# Altium PCB Nixie.PcbDoc
Units mil, origin at the board's own origin, x right, y up, seen from the top; angles counter-clockwise.
Board outline 4881.82 x 1574.73 mil, 2 copper layers (Top Layer, Bottom Layer), stack 61.855 mil thick; 103 components, 85 nets, 313 pads, 101 vias.
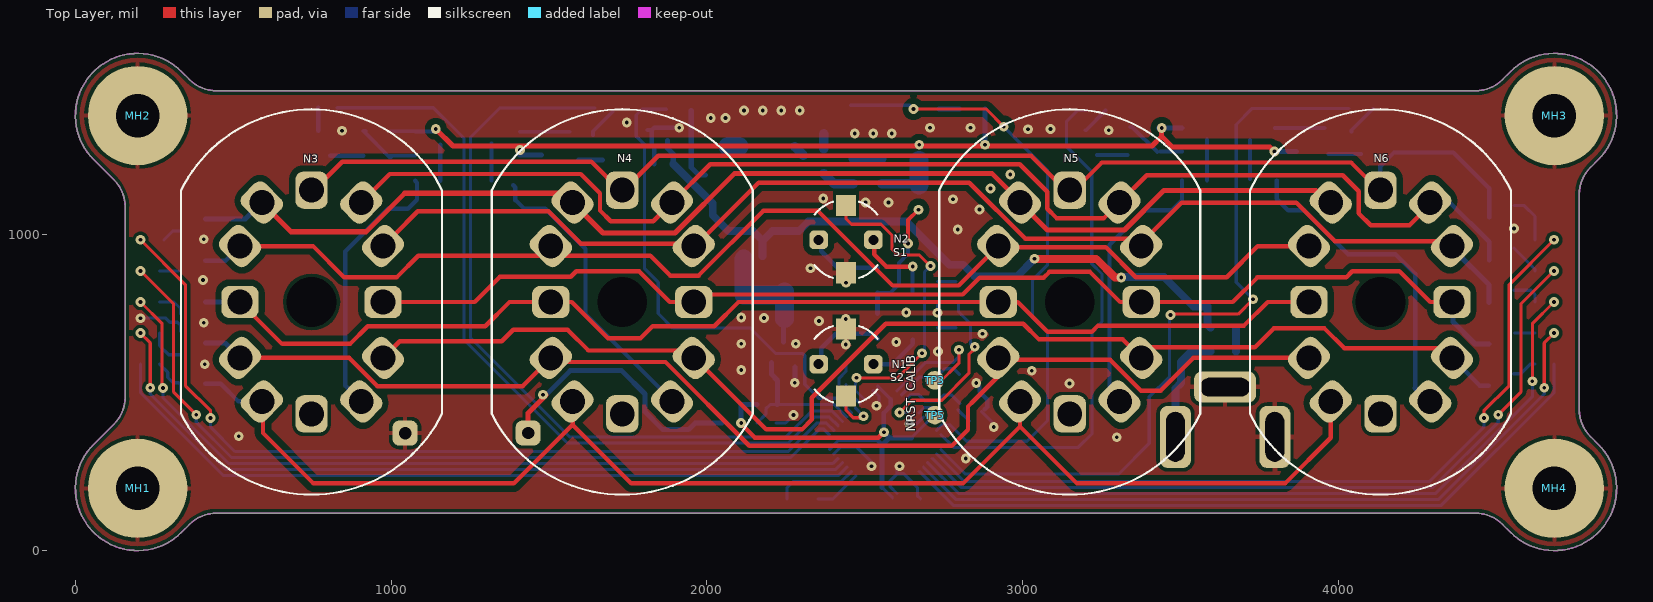
[diagram p0: Top Layer view]
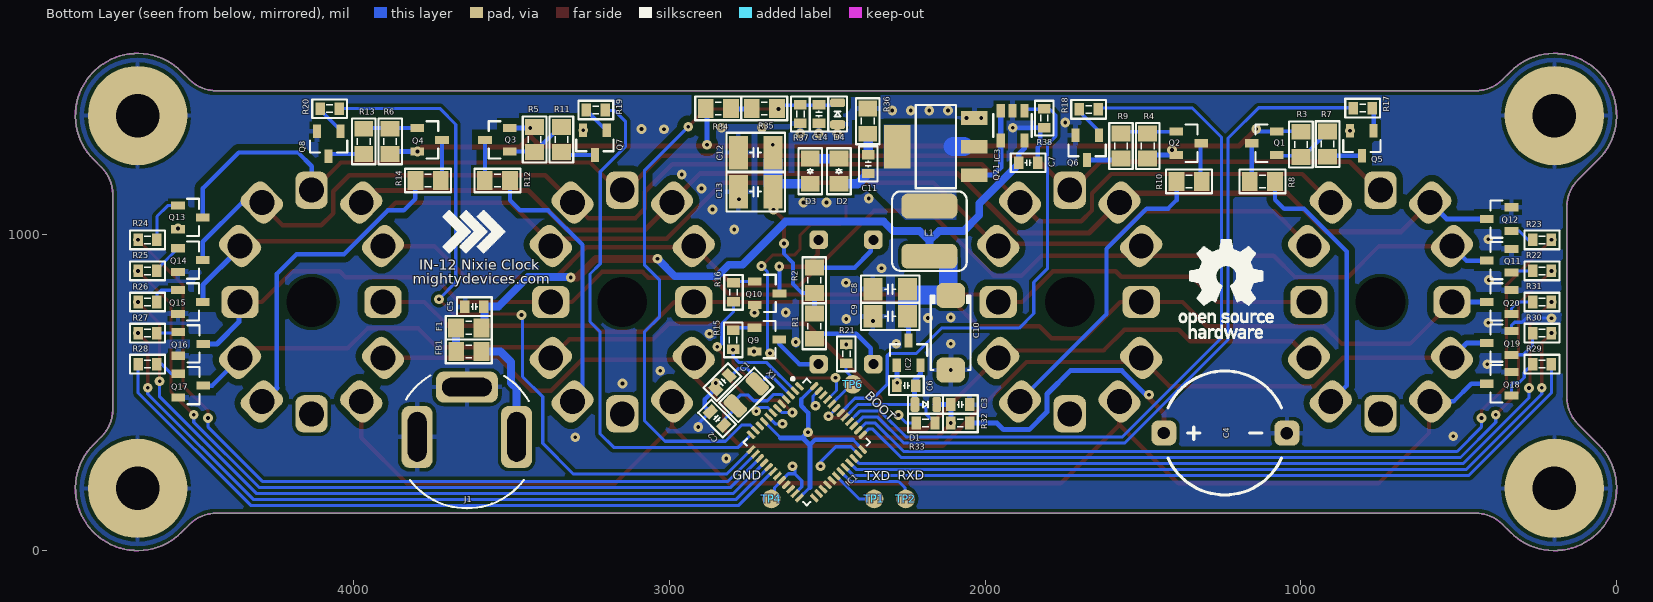
[diagram p1: Bottom Layer view, seen from below]

## Layer stack, top to bottom
Top Layer: signal copper 1.4
Dielectric: core 59.0551, FR-4, Dk 4.8
Bottom Layer: signal copper 1.4

## Board outline
57.66,336.04 122.12,400.51 ccw(c36.77,485.87) 157.48,485.87 157.48,1088.93 ccw(c36.77,1088.93) 122.12,1174.29 57.66,1238.76 cw(c196.85,1377.95) 336.04,1517.15 361.14,1492.05 ccw(c446.5,1577.4) 446.5,1456.69 4435.39,1456.69 ccw(c4435.39,1577.4) 4520.75,1492.05 4545.85,1517.15 cw(c4685.04,1377.95) 4824.23,1238.76 4799.13,1213.66 ccw(c4884.49,1128.3) 4763.78,1128.3 4763.78,446.5 ccw(c4884.49,446.5) 4799.13,361.14 4824.23,336.04 cw(c4685.04,196.85) 4545.85,57.66 4520.75,82.75 ccw(c4435.39,-2.6) 4435.39,118.11 446.5,118.11 ccw(c446.5,-2.6) 361.14,82.75 336.04,57.66 cw(c196.85,196.85)

## Design rules (kind name [scope] priority, off if disabled: settings)
Clearance Clearance_HV [InNetClass('HV') AND (NOT InNet('GND')) vs InPoly] p1: gap=20
Clearance Clearance_BATT [InComponent('BAT') vs InPoly AND NOT (OnLayer('Keep-Out Layer'))] p2: gap=20
Clearance Clearance_Poly [InPoly] p3: gap=11
Clearance Clearance_Fanout [IsPad AND InComponentClass('ICs') vs IsTrack] p4: gap=8
Clearance Clearance_IC [InComponentClass('ICs') vs InComponentClass('ICs')] p5: gap=7
Clearance [All] p6: gap=9
ComponentClearance [All] p1: gap=5 collisioncheckmode=3 verticalgap=0 showdistances=FALSE
HoleSize [All] p1: absolutevalues=TRUE maxlimit=196.85 minlimit=11.81 maxpercent=80.000 minpercent=20.000
MinimumSolderMaskSliver [All] p1: minsoldermaskwidth=1
PolygonConnect PolygonConnect_VSW [InNet('VSW');] p1: connectstyle=Direct reliefconductorwidth=10 reliefentries=4 polygonreliefangle="90 Angle"
PolygonConnect PolygonConnect_IC [InComponentClass('ICs') AND NOT HasFootprint('SOP8')] p2: connectstyle=Relief reliefconductorwidth=10 reliefentries=4 polygonreliefangle="90 Angle"
PolygonConnect PolygonConnect_VIA [IsVia] p3: connectstyle=Direct reliefconductorwidth=10 reliefentries=4 polygonreliefangle="90 Angle"
PolygonConnect [All] p4: connectstyle=Relief reliefconductorwidth=15 reliefentries=4 polygonreliefangle="90 Angle"
RoutingVias [All] p1: holewidth=11.81 width=11.81 viastyle="Through Hole" minholewidth=11.81 minwidth=11.81 maxholewidth=39.37 maxwidth=39.37
SilkToSilkClearance [All] p1: silktosilkclearance=2
SilkscreenOverComponentPads [(InComponent(Comment Like 'N?'))] p1: minsilkscreentomaskgap=1
SolderMaskExpansion SolderMaskExpansion_VIA [IsVia] p1: expansion=-196.85
SolderMaskExpansion [All] p2: expansion=4
Width [All] p1: maxlimit=100 minlimit=9 preferedwidth=10
23 further rules are at their usual default settings.

## Classes and differential pairs
net class HV: 130V FB GND KHV0 KHV1 KHV2 KHV3 KHV4 KHV5 KHV6 KHV7 KHV8 KHV9 NetC11_1 NetD2_2 NetN1_1 NetN1_2 NetN2_1 NetN2_2 NetN3_1 NetN4_1 NetN5_1 NetN6_1 NetQ1_1 NetQ1_3 NetQ2_1 NetQ2_3 NetQ3_1 NetQ3_3 NetQ4_1 NetQ4_3 NetQ5_3 NetQ6_3 NetQ7_3 NetQ8_3 NetR34_1 VSW
component class ICs: IC1

## Components (designator, comment, footprint, x,y, rotation, side; value= is the part's Value field where it differs from the comment)
C1 "15p" 0603_C 2832.55,533.46 r135 bottom
C2 "15p" 0603_C 2849.28,418.31 r225 bottom
C3 "100n" 0603_C 2078.72,462.6 r0 bottom
C4 "0F33/5V5" CPOL_10x6.5 1339.57,372.05 r180 bottom
C5 "1u" 0603_C 3618.11,772.64 r180 bottom
C6 "1u" 0603_C 2249.59,522.64 r180 bottom
C7 "100n" 0603_C 1864.17,1228.35 r0 bottom
C8 "10u" 1206_C 2300.77,827.76 r180 bottom
C9 "10u" 1206_C 2300.77,742.13 r180 bottom
C10 "100u/16V" TAJ_C 2109.25,808.07 r180 bottom
C11 "1n" 0603_C 2370.51,1224.41 r270 bottom
C12 "100n/200V" 1210_C 2726.95,1260.83 r180 bottom
C13 "100n/200V" 1210_C 2726.95,1136.81 r180 bottom
C14 "1n" 0603_C 2526.57,1382.87 r90 bottom
D1 "MCL103A" MICROMELF 2153.54,462.6 r0 bottom
D2 "1N4148" 0805_DSEMI 2463.58,1201.77 r90 bottom
D3 "1N4148" 0805_DSEMI 2554.13,1201.77 r270 bottom
D4 "3V1" MICROMELF 2467.52,1418.31 r270 bottom
F1 "500mA" 0805_PF 3635.98,705.71 r180 bottom
FB1 "100R@100MHz" 0805_FB 3635.83,630.91 r0 bottom
IC1 "STM32L152C8U6" QFN48 2564.96,343.5 r225 bottom
IC2 "MCP1703-3V3" SOT23-3L 2242.7,625.98 r90 bottom
IC3 "IRS44273" SOT23-5AN 1913.39,1346.46 r270 bottom
J1 "FC681445" FC681445_TH 3641.73,360.24 r0 bottom
L1 "4u7/3A" DLG-0504 2176.84,1011.81 r0 bottom
MH1 "Mouting Hole" MH_M3 196.85,196.85 r0 top
MH2 "Mouting Hole" MH_M3 196.85,1377.95 r0 top
MH3 "Mouting Hole" MH_M3 4685.04,1377.95 r0 top locked
MH4 "Mouting Hole" MH_M3 4685.04,196.85 r0 top locked
N1 "INS-1" INS-1 2440.94,590.55 r270 top locked
N2 "INS-1" INS-1 2440.94,984.25 r270 top locked
N3 "INA-12A" IN-12 748.03,787.4 r180 top locked
N4 "INA-12A" IN-12 1732.28,787.4 r180 top locked
N5 "INA-12A" IN-12 3149.61,787.4 r180 top locked
N6 "INA-12A" IN-12 4133.86,787.4 r180 top locked
Q1 "KST92" SOT23-3L 1116.14,1290.35 r0 bottom
Q2 "KST92" SOT23-3L 1355.32,1290.35 r180 bottom
Q3 "KST92" SOT23-3L 3545.11,1301.18 r0 bottom
Q4 "KST92" SOT23-3L 3759.84,1301.18 r180 bottom
Q5 "BF820" SOT23-3L 807.09,1290.35 r270 bottom
Q6 "BF820" SOT23-3L 1677.17,1276.57 r270 bottom
Q7 "BF820" SOT23-3L 3236.22,1292.32 r270 bottom
Q8 "BF820" SOT23-3L 4079.72,1288.39 r270 bottom
Q9 "BF820" SOT23-3L 2691.65,668.31 r180 bottom
Q10 "BF820" SOT23-3L 2690.94,814.96 r180 bottom
Q11 "BF820" SOT23-3L 372.05,918.31 r0 bottom
Q12 "BF820" SOT23-3L 372.05,1050.2 r0 bottom
Q13 "BF820" SOT23-3L 4517.72,1055.12 r180 bottom
Q14 "BF820" SOT23-3L 4517.72,920.27 r180 bottom
Q15 "BF820" SOT23-3L 4517.72,787.4 r180 bottom
Q16 "BF820" SOT23-3L 4516.73,654.53 r180 bottom
Q17 "BF820" SOT23-3L 4516.73,522.64 r180 bottom
Q18 "BF820" SOT23-3L 372.05,528.54 r0 bottom
Q19 "BF820" SOT23-3L 372.05,657.48 r0 bottom
Q20 "BF820" SOT23-3L 372.05,787.4 r0 bottom
Q21 "IRFL4315" SOT-223_Connected 2156.5,1279.53 r90 bottom
R1 "1M" 0805_R 2541.34,710.63 r90 bottom
R2 "1M" 0805_R 2541.34,856.3 r270 bottom
R3 "1M" 0805_R 1000,1286.42 r270 bottom
R4 "1M" 0805_R 1485.24,1281.5 r90 bottom
R5 "1M" 0805_R 3427.17,1302.17 r270 bottom
R6 "1M" 0805_R 3884.84,1296.26 r90 bottom
R7 "1M" 0805_R 915.35,1287.4 r270 bottom
R8 "0" 0805_R 1122.05,1169.29 r0 bottom
R9 "1M" 0805_R 1569.88,1281.5 r270 bottom
R10 "0" 0805_R 1354.33,1169.29 r180 bottom
R11 "1M" 0805_R 3342.52,1302.17 r270 bottom
R12 "0" 0805_R 3545.28,1172.24 r0 bottom
R13 "1M" 0805_R 3968.5,1296.26 r270 bottom
R14 "0" 0805_R 3764.76,1172.24 r180 bottom
R15 "33k" 0603_R 2798.23,667.32 r270 bottom
R16 "33k" 0603_R 2797.24,817.91 r270 bottom
R17 "33k" 0603_R 804.13,1401.57 r0 bottom
R18 "33k" 0603_R 1672.24,1397.64 r180 bottom
R19 "33k" 0603_R 3233.27,1395.67 r180 bottom
R20 "33k" 0603_R 4076.77,1399.61 r180 bottom
R21 "33k" 0603_R 2439.94,623.03 r90 bottom
R22 "33k" 0603_R 236.22,885.83 r180 bottom
R23 "33k" 0603_R 236.22,984.25 r180 bottom
R24 "33k" 0603_R 4653.54,984.25 r0 bottom
R25 "33k" 0603_R 4653.54,885.83 r0 bottom
R26 "33k" 0603_R 4653.54,787.4 r0 bottom
R27 "33k" 0603_R 4653.54,688.98 r0 bottom
R28 "33k" 0603_R 4653.54,590.55 r0 bottom
R29 "33k" 0603_R 236.22,590.55 r180 bottom
R30 "33k" 0603_R 236.22,688.98 r180 bottom
R31 "33k" 0603_R 236.22,787.4 r180 bottom
R32 "330" 0603_R 2078.72,404.15 r180 bottom
R33 "10k" 0603_R 2188.98,404.15 r180 bottom
R34 "470k" 0805_R 2845.47,1400.59 r0 bottom
R35 "470k" 0805_R 2699.8,1400.68 r0 bottom
R36 "330" 0805_R 2372.05,1360.24 r270 bottom
R37 "10k" 0603_R 2585.63,1382.87 r270 bottom
R38 "33k" 0603_R 1812.99,1370.08 r270 bottom
S1 "SW-PB" DTSM32N 2440.94,986.22 r270 top
S2 "SW-PB" DTSM32N 2440.94,595.47 r90 top
TP1 "Test Point" TP_1_5 2351.95,163.39 r180 bottom
TP2 "Test Point" TP_1_5 2251.95,163.39 r180 bottom
TP3 "Test Point" TP_1_5 2722.44,539.37 r0 top
TP4 "Test Point" TP_1_5 2677.31,163.39 r180 bottom
TP5 "Test Point" TP_1_5 2722.44,429.13 r0 top
TP6 "Test Point" TP_1_5 2419.12,526.57 r180 bottom
X1 "32k" CFPX–217 2756.76,493.11 r135 bottom

## Footprints (in the part's own frame and the unit in brackets; to place one, negate y for a bottom-side part, rotate by r counter-clockwise, add the part's x,y. Pads: shape width x height; smd on the part's side, far side on the other; paste and mask are expansions set on the pad)
0603_C [mil]
  rect 30x40 smd: 1(-30,0) 2(30,0)
  silkscreen extent -55,-30 55,30, body extent -32,-17 32,17, height 26
0603_R [mil]
  rect 30x40 smd: 1(-30,0) 2(30,0)
  silkscreen extent -55,-30 55,30, body extent -32,-17 32,17, height 26
0805_DSEMI [mil]
  rect 50x60 smd: 1(-40,0) 2(40,0)
  silkscreen extent -73,-37 73,37, body extent -41,-28 41,28, height 11
0805_FB [mil]
  rect 50x60 smd: 1(-40,0) 2(40,0)
  silkscreen extent -73,-37 73,37, body extent -42,-28 42,28, height 36
0805_PF [mil]
  rect 50x60 smd: 1(-40,0) 2(40,0)
  silkscreen extent -73,-37 73,37, body extent -42,-28 42,28, height 36
0805_R [mil]
  rect 50x60 smd: 1(-40,0) 2(40,0)
  silkscreen extent -73,-37 73,37, body extent -42,-28 42,28, height 36
1206_C [mil]
  rect 60x70 smd: 1(-55,0) 2(55,0)
  silkscreen extent -93,-43 93,43, body extent -62,-32 62,32, height 42
1210_C [mil]
  rect 60x106.3 smd: 1(-55,0) 2(55,0)
  silkscreen extent -93,-63 93,63, body extent -74,-51 74,51, height 42
CFPX–217 [mm]
  rrect50% 1.1x1.9 smd: 1(-1.25,0) 2(1.25,0)
  silkscreen extent -2,-1.1 2,1.1, body extent -1.6,-0.75 1.6,0.75, height 0.9
CPOL_10x6.5 [mm]
  rrect50% 2x2 hole 1: 1(-2.4,0.01) 2(7.5,0)
  silkscreen extent -2.07,-4.97 7.07,5, body extent -2.4,-4.98 7.56,5, height 6.6
DLG-0504 [mm]
  rrect50% 4.5x2 smd: 1(0,2.02) 2(0,-2.02)
  silkscreen extent -3,-3.2 3,3.2, body extent -2.48,-2.49 2.5,2.5, height 3.5
DTSM32N [mm]
  rect 1.7x1.6 smd: 1(-2.7,0) 2(2.7,0)
  body extent -3,-1 3,1, height 5
FC681445_TH [mm]
  rrect50% 2.5x5 hole 1.5 slot 4 at 90 deg: 1(-4,0) 3(4,0)
  rrect50% 5x2.5 hole 1.5 slot 4 at 0 deg: 2(0,-4)
  silkscreen extent -4.97,-4.93 4.9,5.75
IN-12 [mm]
  rrect50% 0x0 hole 4 unplated: 0(0,0)
  rrect50% 2.6x3 hole 2 rot 45: 1(-4,8) 2(-5.75,4.5) 7(4,-8) 8(5.75,-4.5)
  rrect50% 3x2.6 hole 2: 3(-5.75,0) 9(5.75,0)
  rrect50% 2.6x3 hole 2 rot 135: 4(-5.75,-4.5) 5(-4,-8) 10(5.75,4.5) 11(4,8)
  rrect50% 2.6x3 hole 2: 6(0,-9) 12(0,9)
  silkscreen extent -10.5,-15.5 10.5,15.5
INS-1 [mm]
  rrect50% 1.5x1.5 hole 0.8: 1(0,-2.2) 2(0,2.2)
  silkscreen extent -3.07,-2.54 3.07,2.54
MH_M3 [mm]
  round 8 hole 3.5: 1(0,0)
MICROMELF [mm]
  rrect50% 0.7x1.2 smd: 1(1.75,0) 2(0,0)
  silkscreen extent -0.5,-0.75 2.3,0.75, body extent 0,-0.6 1.8,0.6, height 1.3
QFN48 [mm]
  rrect50% 0.8x0.3 smd: 1(-3.6,2.75) 2(-3.6,2.25) 3(-3.6,1.75) 4(-3.6,1.25) 5(-3.6,0.75) 6(-3.6,0.25) 7(-3.6,-0.25) 8(-3.6,-0.75) 9(-3.6,-1.25) 10(-3.6,-1.75) 11(-3.6,-2.25) 12(-3.6,-2.75) 25(3.6,-2.75) 26(3.6,-2.25) 27(3.6,-1.75) 28(3.6,-1.25) 29(3.6,-0.75) 30(3.6,-0.25) 31(3.6,0.25) 32(3.6,0.75) 33(3.6,1.25) 34(3.6,1.75) 35(3.6,2.25) 36(3.6,2.75)
  rrect50% 0.3x0.8 smd: 13(-2.75,-3.6) 14(-2.25,-3.6) 15(-1.75,-3.6) 16(-1.25,-3.6) 17(-0.75,-3.6) 18(-0.25,-3.6) 19(0.25,-3.6) 20(0.75,-3.6) 21(1.25,-3.6) 22(1.75,-3.6) 23(2.25,-3.6) 24(2.75,-3.6) 37(2.75,3.6) 38(2.25,3.6) 39(1.75,3.6) 40(1.25,3.6) 41(0.75,3.6) 42(0.25,3.6) 43(-0.25,3.6) 44(-0.75,3.6) 45(-1.25,3.6) 46(-1.75,3.6) 47(-2.25,3.6) 48(-2.75,3.6)
  silkscreen extent -4.5,-3.6 3.6,3.6, body extent -3.6,-3.6 3.6,3.6, height 0.8
SOT23-3L [mm] "SOT23, 3-Leads, Body 2.9x1.3mm, Pitch 0.95mm, Lead Span 2.5mm, IPC High Density"
  rect 1.1x0.65 smd: 1(-1,0.95) 2(-1,-0.95) 3(1,0)
  silkscreen extent -0.25,-1.5 0.7,1.5, body extent -1.3,-1.5 1.3,1.5, height 1.1
SOT23-5AN [mm] "SOT23, 5-Leads, Body 2.9x1.6mm, Pitch 0.95mm, Lead Span 2.8mm, IPC Medium Density"
  rect 1.1x0.65 smd: 1(-1.2,0.95) 2(-1.2,0) 3(-1.2,-0.95) 4(1.2,-0.95) 5(1.2,0.95)
  silkscreen extent -0.9,-1.55 0.9,1.55, body extent -1.5,-1.5 1.5,1.5, height 1.1
SOT-223_Connected [mm] "SOT-223/SC-73; 4 Leads; Body 6.7 x 7.3 mm, inc. leads (LxW max)"
  rect 1.1x2.15 smd: 1(-2.3,-3.1) 2(0,-3.1) 3(2.3,-3.1)
  rect 3.5x2.15 smd: 2(0,3.1)
  silkscreen extent -3.35,-1.63 3.35,1.63, body extent -3.25,-3.7 3.25,2.95, height 2
TAJ_C [mm]
  rrect50% 2.3x2 smd: 1(0,0) 2(0,-6)
  silkscreen extent -1.6,-6 1.6,0, body extent -1.5,-6.1 1.5,0.05, height 2.61
TP_1_5 [mm]
  round 1.5 smd: 1(0,0)

## Part data
C1 C2 C3 C5 C6 C7 C8 C9 C11 C12 C13 C14: library part "Capacitor (Non Polar)", "Capacitor"
C4 C10: library part "Capacitor (Electrolytic)", "Capacitor"
D1: library part "Diode Schottky", "Silicon Diode"
D2 D3: library part Diode, "Silicon Diode"
D4: library part "Diode Zener", "Silicon Zener Diode"
F1: library part Fuse, "Polymer Fuse"
FB1: library part "Ferrite Bead", "Ferrite Bead"
IC1: library part STM32L152C6U6, "Cortex-M3 MCU"
IC2: library part MCP1703, "250 mA, 16V, Low Quiescent Current LDO Regulator"
IC3: "Single Low-Side Driver IC"
J1: "DC Connector"
L1: library part INDUCTOR, "Inductor"
N1 N2: "Neon Bulb"
N3 N4 N5 N6: library part IN-12A, "Nixie Tube"
Q5 Q6 Q7 Q8 Q9 Q10 Q11 Q12 Q13 Q14 Q15 Q16 Q17 Q18 Q19 Q20: "NPN high-voltage transistor"
Q21: "HEXFET Power MOSFET"
R1 R2 R3 R4 R5 R6 R7 R8 R9 R10 R11 R12 R13 R14 R15 R16 R17 R18 R19 R20 R21 R22 R23 R24 R25 R26 R27 R28 R29 R30 R31 R32 R33 R34 R35 R36 R37 R38: library part Resistor, "Resistor"
S1 S2: "Switch"
X1: library part Crystal, "Crystal Resonator"

## Via types
v1: diameter 30.81, hole 11.81, Top Layer to Bottom Layer, 66 vias
v2: diameter 31, hole 11.81, Top Layer to Bottom Layer, 35 vias

## Nets (pads, with @x,y where several pads share a name; then routed paths per layer and width w, separated by ;. In a path a pad name is that pad's centre, name@x,y a point inside that pad or via, vN(x,y) a via of type N, cw(c..) or ccw(c..) an arc to the next point about the centre after c; other vN are vias at no path point)
3V0: C3.2 D1.2 IC1.9 IC1.24 IC1.36 IC1.48 R32.1 | length 1327.2
  Top Layer w14: v2@2108.72,401.12 2152.56,357.28 2543.31,357.28 v2(2561.02,375)
  Bottom Layer w10: IC1.36 2420.04,351.7 ; IC1.48 2582.6,478.97 ; 2555.69,199.66 IC1.24 ; 2648.34,357.28 IC1.9
  Bottom Layer w14: 2420.04,351.7 2538.23,351.7 2555.69,334.24 ; v2(2561.02,375) 2561.02,436.9 2582.6,458.48 2582.6,478.97
  Bottom Layer w16: v2(2108.72,404.15) C3.2 D1.2 D1.2@2158.94,462.6 ; 2555.69,199.66 2555.69,334.24 2578.74,357.28 ; v2(2561.02,375) 2578.74,357.28 ; 2648.34,357.28 2578.74,357.28
3V3: C6.2 D1.1 IC1.41 IC2.2 R33.2 | length 476.8
  Bottom Layer w10: R33.2 2187.01,432.18 2187.01,448.82 2200.79,462.6 D1.1 2404.11,462.6 IC1.41
  Bottom Layer w16: IC2.2@2204.72,595.47 2204.72,558.14 2223.94,538.93 2223.94,464.09 D1.1
12V: C5.2 C7.2 C8.2 C9.2 C10.1 F1.2 IC2.3 IC3.5 L1.1 | length 2598.7
  Top Layer w25: v1(3038.37,924.21) 3233.27,924.21 3292.72,864.76 v2(3312.58,864.76)
  Bottom Layer w16: IC3.5 1875.98,1273.62 1893.7,1255.91 C7.2@1893.7,1224.41 ; IC2.3@2242.7,660.43 C9.2@2242.7,731.18
  Bottom Layer w25: C7.2@1893.7,1224.41 2018.7,1099.41 2018.7,1062.01 2068.9,1011.81 2146,1011.81 2176.84,980.97 ; L1.1 2176.84,980.97 ; v1(3038.37,924.21) 2983.25,869.09 2848.43,869.09 2812.01,905.51 2768.7,905.51 2632.43,1041.78 2321.31,1041.78 2291.34,1011.81 2207.68,1011.81 2176.84,980.97 ; v2@3312.58,866.14 3448.73,866.14 3542.23,772.64 3586.61,772.64 3586.61,715.08 F1.2
  Bottom Layer w60: L1.1@2117.13,923.23 2117.13,809.06 C8.2@2245.08,809.06 ; C9.2@2245.77,734.25 C8.2@2245.77,819.88
130V: C12.2 C13.2 D3.2 Q1.2 Q2.2 Q3.2 Q4.2 R1.2 R2.2 R3.1 R4.1 R5.1 R6.1 R34.2 | length 3783.7
  Top Layer w12: v2(2637.38,972.44) 2637.38,1046.83 v2(2670.28,1079.72)
  Top Layer w16: v1(1141.73,1335.63) 1195.79,1281.57 3410.36,1281.57 ; 3410.43,1281.5 3440.94,1312.01 ; v2(3440.94,1338.58) 3440.94,1312.01 ; v2@3797.24,1264.76 3783.46,1278.54 3474.41,1278.54 3440.94,1312.01
  Bottom Layer w12: R3.1@998.03,1328.39 Q1.2@1071.22,1328.39 ; Q1.2 v1@1133.86,1327.76 ; R2.2 2581.06,816.3 2608.84,844.08 2608.84,911.42 2637.38,939.96 v2(2637.38,972.44) v2@2638.7,973.75
  Bottom Layer w16: Q2.2@1406.5,1252.95 R4.1@1475.75,1252.95 ; R1.2 R2.2 ; R34.2@2880.55,1398.62 2880.55,1285.08 v2(2880.91,1285.43) ; R5.1@3431.46,1338.58 Q3.2 ; Q4.2@3807.09,1264.76 R6.1@3868.46,1264.76
  Bottom Layer w30: D3.2 C13.2@2666.34,1161.77
  Bottom Layer w60: C13.2@2671.95,1157.48 C12.2@2671.95,1235.51
  other v1: 1408.46,1268.7 2673.23,1285.08
  other v2: 3798.23,1263.78
A1: IC1.39 R17.2 | length 2445.7
  Bottom Layer w10: R17.2@829.21,1402.56 1133.86,1402.56 1222.93,1313.48 1231.3,1305.12 1231.3,667.03 1557.18,341.15 1557.31,341.02 2258.63,341.02 2340.46,422.84 2388.19,422.84 IC1.39
A2: IC1.40 R18.2 | length 2424.2
  Bottom Layer w10: R18.2@1646.18,1401.57 1343.5,1401.57 1251.97,1310.04 1251.97,673.23 1565.18,360.02 2250.76,360.02 2332.59,441.84 2397.03,441.84 IC1.40
A3: IC1.12 R19.2 | length 1640.4
  Bottom Layer w10: IC1.12 2782.13,326.77 3177.14,326.77 3220.06,369.69 3220.06,693.5 3251.97,725.41 3251.97,875.98 3219.49,908.46 3219.49,1199.8 3139.76,1279.53 3139.76,1360.24 3173.23,1393.7 R19.2@3203.27,1393.7
A4: IC1.13 R20.2 | length 2397.7
  Top Layer w10: v2@3468.5,749.02 3683.07,749.02 v1(3730.31,796.26)
  Bottom Layer w10: IC1.13 2819.45,242.13 3304.13,242.13 3401.57,339.57 3401.57,487.2 3465.55,551.18 v2@3465.55,743.11 ; v1(3730.31,796.26) 3677.17,849.41 3677.17,1349.82 3727.94,1400.59 R20.2@4034.45,1400.59
  other v2: 3468.5,746.06
BOOT0: IC1.44 R21.1 TP6.1 | length 149.1
  Bottom Layer w10: TP6.1 2419.12,545.65 2440.93,567.46 R21.1@2440.93,586.14 ; TP6.1@2440.78,526.57 2440.78,509.44 IC1.44
DOWN: IC1.45 S1.1 | length 1007.2
  Top Layer w10: S1.1 2440.94,1050.77 2458.25,1033.46 2551.76,1033.46 2586.61,998.61 2586.61,954.31 2604.9,936.02 2673.8,936.02 v2(2708.25,901.57) ; v2@2471.05,546.26 2602.94,546.26 v2(2681.68,625)
  Bottom Layer w10: v2@2471.05,546.26 2471.05,507.02 IC1.45 ; v2(2681.68,625) 2689.55,632.87 2689.55,882.87 v2(2708.25,901.57)
  other v2: 2474,547.24
FB: C14.2 D4.2 IC1.11 R35.1 R37.1 | length 1932.5
  Top Layer w10: v2(2654.88,1398.71) 2884.75,1398.71 v2(2940.95,1342.52)
  Bottom Layer w10: D4.2@2454.72,1410.43 R35.1@2643.16,1410.43 ; IC1.11 2744.37,397.64 2771.64,397.64 2822.82,346.46 3014.35,346.46 3079.31,411.42 3079.31,693.32 3031.5,741.14 3031.5,856.3 3078.74,903.54 3078.74,1204.73 v2(2940.95,1342.52) v2@2940.45,1343.01
GND: C1.1 C2.1 C3.1 C4.2 C5.1 C6.1 C7.1 C8.1 C9.1 C10.2 C12.1 C13.1 C14.1 D4.1 IC1.8 IC1.20 IC1.23 IC1.35 IC1.47 IC2.1 IC3.2 J1.2 J1.3 MH1.1 MH2.1 MH3.1 MH4.1 Q5.2 Q6.2 Q7.2 Q8.2 Q9.2 Q10.2 Q11.2 Q12.2 Q13.2 Q14.2 Q15.2 Q16.2 Q17.2 Q18.2 Q19.2 Q20.2 Q21.3 R21.2 R33.1 R36.1 R37.2 R38.2 S1.2 S2.2 TP4.1 | length 1163.5
  Bottom Layer w10: v1(206.22,736.22) 286.06,736.22 299.08,723.2 323.13,723.2 332.68,713.66 Q19.2 ; R33.1 2249.62,404.15 v1(2274.61,429.13) ; IC1.35 2424.92,328.74 2474,328.74 2522.91,279.83 v1@2522.91,266.73 ; IC1.47 2545.85,487.89 2545.85,466.77 v2(2537.74,458.66) ; IC1.23 2581.28,201.91 2581.28,221.46 2602.94,243.11 ; v1(2610.24,266.73) 2602.94,259.43 2602.94,243.11 ; v2(2642.31,401.57) 2643.29,400.59 2663.8,400.59 IC1.8 ; TP4.1 2666.9,173.79 2666.9,199.8 IC1.20 2623.6,243.11 2602.94,243.11 ; v1@2730.31,753.53 Q10.2 ; C2.1 2908.59,401.43 v1(2908.59,391.73)
  Bottom Layer w14: R38.2@1812.99,1332.2 R38.2@1825.79,1332.2 ; C7.1@1834.17,1223.43 C7.1 1834.17,1278.11 1825.79,1286.49 R38.2@1825.79,1332.2 ; v1(1912.4,1339.57) 1833.15,1339.57 R38.2@1825.79,1332.2 ; C1.1@2863.73,520.13 2863.73,503.39 2887.8,479.33 2887.8,454.72 C2.1@2880.47,447.39
  Bottom Layer w16: C6.1@2279.53,532.01 IC2.1@2279.53,581.69
  other v1: 2521.82,266.73 2819.88,291.34 3298.31,359.25 517.72,362.2 3149.2,529.53 2853.71,530.51 2279.02,531.5 3029.53,569.88 2109.25,571.85 409.45,590.55 2732.27,630.91 2439.94,653.03 2109.25,655.02 2281.5,655.02 2600.38,660.43 2873.03,686.59 406.79,721.46 2355.77,727.36 2439.94,733.27 2181.1,736.86 2109.25,738.19 2730.89,752.95 2631.89,753.94 2440.78,848.43 404.27,857.11 2328.74,894.66 406.79,986.22 2795.28,1016.73 4557.1,1020.25 2864.17,1080.71 2502.95,1102.36 2575.79,1102.36 2779.88,1113.19 2369.09,1115.16 2898.62,1146.65 2961.61,1190.94 2468.5,1320.87 2527.07,1320.87 2585.63,1320.87 844.49,1329.72 3273.62,1331.69 3017.72,1334.65 3088.58,1335.63 2706.69,1339.57 2835.63,1339.57 1746.06,1356.3 2012.8,1370.08 2059.06,1370.08 2118.11,1393.7 2176.84,1393.7 2235.56,1393.7 2294.29,1393.7
K0: IC1.18 R28.2 | length 2294.3
  Bottom Layer w10: IC1.18@2672.56,250.67 2780.2,143.03 4327.09,143.03 4683.54,499.49 R28.2
K1: IC1.32 R29.2 | length 2447.9
  Bottom Layer w10: R29.2 206.22,499.49 467.73,237.98 2289.94,237.98 2290,238.03 2417.73,238.03 IC1.32
K2: IC1.33 R30.2 | length 2506.3
  Top Layer w10: v2(206.22,688.98) 237.2,657.99 v2(237.2,515.75)
  Bottom Layer w10: v2(237.2,515.75) 237.2,496.06 476.29,256.98 2282.07,256.98 2282.13,257.03 2408.89,257.03 IC1.33
K3: IC1.34 R31.2 | length 2559.9
  Top Layer w10: v1(206.22,787.4) 274.61,719.02 v1@274.61,517.72
  Bottom Layer w10: v1(277.56,514.76) 277.56,484.25 485.83,275.98 2274.2,275.98 2274.26,276.03 2400.05,276.03 IC1.34
K4: IC1.37 R22.2 | length 2648.6
  Top Layer w10: v2(206.22,885.83) 311.02,781.02 311.02,501.97 v2(382.87,430.12)
  Bottom Layer w10: v2(382.87,430.12) 382.87,406.5 494.39,294.98 2266.33,294.98 2356.2,384.84 2370.51,384.84 IC1.37
K5: IC1.38 R23.2 | length 2737.8
  Top Layer w10: v2(206.22,984.25) 348.43,842.05 348.43,522.64 428.15,442.91 v2(428.15,420.28)
  Bottom Layer w10: v2(428.15,420.28) 428.15,390.89 505.06,313.98 2258.46,313.98 2348.33,403.84 2379.35,403.84 IC1.38
K6: IC1.14 R24.2 | length 2526.3
  Top Layer w10: v2(4461.61,420.28) 4461.61,442.91 4541.34,522.64 4541.34,842.05 v2(4683.54,984.25)
  Bottom Layer w10: IC1.14 2814.71,219.03 4289.76,219.03 4461.61,390.89 v2(4461.61,420.28)
K7: IC1.15 R25.2 | length 2469.1
  Top Layer w10: v2(4506.89,430.12) 4578.74,501.97 4578.74,781.02 v2(4683.54,885.83)
  Bottom Layer w10: IC1.15 2805.87,200.03 4300.43,200.03 4506.89,406.5 v2(4506.89,430.12)
K8: IC1.16 R26.2 | length 2410.6
  Top Layer w10: v2(4615.16,536.42) 4615.16,719.02 v2(4683.54,787.4)
  Bottom Layer w10: IC1.16@2700.11,278.22 2797.3,181.03 4308.99,181.03 4615.16,487.2 v2(4615.16,536.42)
K9: IC1.17 R27.2 | length 2352.7
  Top Layer w10: v2(4652.56,515.75) 4652.56,657.99 v2(4683.54,688.98)
  Bottom Layer w10: IC1.17@2686.34,264.45 2788.75,162.03 4318.53,162.03 4652.56,496.06 v2(4652.56,515.75)
KDOT0/CALIB: IC1.2 R15.2 TP3.1 | length 440.6
  Top Layer w10: TP3.1@2697.83,527.56 2732.28,527.56 2799.21,594.49 v2(2799.21,636.34)
  Bottom Layer w10: IC1.2 2691.65,595.47 2779.12,595.47 2798.23,614.58 R15.2 R15.2@2791.81,637.32
KDOT1: IC1.6 R16.2 | length 589.1
  Top Layer w10: v2(2610.81,437.54) 2649.65,476.38 2745.08,476.38 2830.14,561.44 2830.14,621.01 2849,639.87 v2(2849,645.67)
  Bottom Layer w10: v2(2610.81,437.54) 2636.48,437.54 ; 2638.2,437.54 2645.08,437.54 IC1.6 ; R16.2 2797.24,755.91 2835.63,717.51 2835.63,653.23 2849,639.87 v2(2849,645.67)
KHV0: N3.2 N4.2 N5.2 N6.2 Q17.3 | length 3977.5
  Top Layer w14: N3.2 1027.56,663.39 1350.39,663.39 1386.81,699.8 1559.06,699.8 1625,633.86 1935.04,633.86 N4.2 1961.61,610.24 2187.99,383.86 2301.48,383.86 2332.68,415.06 2332.68,484.25 2566.93,718.5 3002.74,718.5 3052.43,668.82 3317.4,668.82 N5.2 3409.45,643.7 3736.22,643.7 3796.26,703.74 3956.69,703.74 4019.68,640.75 4329.72,640.75 N6.2
  Bottom Layer w14: N6.2@4382.46,588.58 4448.41,522.64 Q17.3
KHV1: N3.11 N4.11 N5.11 N6.11 Q18.3 | length 4374.6
  Top Layer w14: N3.11@594.08,464.57 594.08,372.46 753.85,212.69 1388.87,212.69 1574.8,398.62 ; N4.11 1574.8,398.62 ; N5.11 2992.13,393.29 ; N6.11 3976.38,357.39 3831.68,212.69 3172.73,212.69 2992.13,393.29 ; 1574.8,398.62 1760.74,212.69 2811.52,212.69 2992.13,393.29
  Bottom Layer w14: Q18.3 460.22,528.54 516.32,472.44 N3.11
KHV2: N3.10 N4.10 N5.10 N6.10 Q19.3 | length 3962.6
  Top Layer w14: N3.10 867.13,610.24 956.69,520.67 1416.34,520.67 N4.10 1518.7,597.44 1869.09,597.44 2134.84,331.69 2776.57,331.69 2827.41,382.52 2827.41,456.47 2845.8,474.86 2845.93,474.86 2923.23,552.17 N5.10 N5.10@2929.13,604.33 ; N5.10@2958.85,604.33 3277.56,604.33 3375.53,506.36 3437.46,506.36 3541.34,610.24 N6.10 N6.10@3901.58,604.33
  Bottom Layer w16: Q19.3 474.41,657.48 N3.10
KHV3: N3.9 N4.9 N5.9 N6.9 Q20.3 | length 3780
  Top Layer w14: N3.9 654.53,654.53 870.08,654.53 926.18,710.63 1298.23,710.63 1375,787.4 1571.85,787.4 1687.01,672.24 1789.94,672.24 1828.33,710.63 2023.62,710.63 2100.39,787.4 2985.24,787.4 3079.98,692.66 3219.22,692.66 3239.16,712.6 3701.77,712.6 3776.57,787.4 N6.9
  Bottom Layer w16: Q20.3 N3.9
KHV4: N3.8 N4.8 N5.8 N6.8 Q11.3 | length 3949.7
  Top Layer w14: N3.8 752.54,964.57 851.95,865.16 1017.31,865.16 1086.2,934.06 1475.39,934.06 N4.8 1536.42,934.06 1821.44,934.06 1884.43,871.06 1974,871.06 2178.72,1075.79 2352.36,1075.79 2588.58,839.57 2798.23,839.57 2920.09,961.43 3259.76,961.43 3260.56,960.63 3264.35,960.63 3358.84,866.14 3646.65,866.14 3745.08,964.57 N6.8
  Bottom Layer w14: Q11.3 475.39,918.31 N3.8
KHV5: N3.7 N4.7 N5.7 N6.7 Q12.3 | length 3875.9
  Top Layer w16: N3.7 683.07,1009.84 920.85,1009.84 1042.9,1131.89 1545.28,1131.89 N4.7 1671.26,1005.91 1899.07,1005.91 2087.06,1193.9 2904.12,1193.9 N5.7@2986.79,1111.22 ; N5.7 3078.74,1015.75 3322.83,1015.75 3447.83,1140.75 3930.2,1140.75
  Bottom Layer w16: Q12.3 538.39,1050.2 N3.7
KHV6: N3.6 N4.6 N5.6 N6.6 Q13.3 | length 4291.5
  Top Layer w14: N3.6@727.94,1114.17 845.06,1231.3 1634.43,1231.3 1730.4,1135.33 1846.05,1250.98 3027.15,1250.98 N5.6@3168.39,1109.74 ; N5.6@3166.22,1143.99 3251.56,1229.33 4040.93,1229.33 N6.6@4156.58,1113.68
  Bottom Layer w14: N6.6@4133.45,1136.81 4133.45,1217.52 4176.75,1260.83 4364.75,1260.83 4478.35,1147.23 Q13.3
KHV7: N3.5 N4.5 N5.5 N6.5 Q14.3 | length 4177.9
  Top Layer w14: N3.5 996.06,1192.91 1600.97,1192.91 1661.65,1132.23 1661.65,1077.12 1695.46,1043.31 1830.71,1043.31 N4.5 2010.83,1223.43 2991.72,1223.43 3078.33,1136.81 3078.33,1082.68 3107.86,1053.15 3257.87,1053.15 N5.5 3393.7,1188.98 4014.64,1188.98 4065.53,1138.08 4065.53,1067.91 4102.94,1030.51 4225.97,1030.51 N6.5@4288.96,1093.5
  Bottom Layer w14: N6.5@4289.94,1100.39 4355.89,1100.39 4478.35,977.94 Q14.3
KHV8: N3.4 N4.4 N5.4 N6.4 Q15.3 | length 3928.7
  Top Layer w14: N3.4@1008.86,999.02 1084.65,1074.8 1498.61,1074.8 1600.97,972.44 1971.05,972.44 2163.96,1165.35 2831.69,1165.35 3008.86,988.19 3390.34,988.19 3504.51,1102.36 3867.13,1102.36 3989.17,980.31 4375.98,980.31 N6.4@4394.68,999.02
  Bottom Layer w16: N6.4@4368.68,950.79 4478.35,841.13 Q15.3 Q15.3@4477.36,786.42
KHV9: N3.3 N4.3 N5.3 N6.3 Q16.3 | length 3780.6
  Top Layer w14: N3.3 1264.76,787.4 1344.78,867.41 1568.77,867.41 1586.2,884.84 1785.43,884.84 1882.87,787.4 N4.3 ; N4.3@1988.19,811.02 2811.02,811.02 2864.76,864.76 3067.52,864.76 3085.43,882.67 3213.77,882.67 3309.04,787.4 N5.3 3666.34,787.4 3744.09,865.16 4025.18,865.16 4044.87,884.84 4193.9,884.84 4291.34,787.4 N6.3
  Bottom Layer w16: N6.3@4363.76,775.59 4363.76,724.41 4433.65,654.53 Q16.3
NetC1_2: C1.2 IC1.3 X1.2 | length 240
  Bottom Layer w10: IC1.3 2674.22,550.2 2691.93,550.2 2710.28,531.85 2754.22,575.79 2782.48,575.79 C1.2@2799.65,558.61
NetC2_2: C2.2 IC1.4 X1.1 | length 257
  Bottom Layer w10: IC1.4 2646.64,494.78 2670.16,494.78 2690.53,474.41 2733.27,474.41 2752.14,493.28 2774.44,493.28 X1.1@2801.53,466.19 ; X1.1@2795.48,446.4 C2.2@2831.98,409.89
NetC4_1: C4.1 R32.2 | length 875.2
  Top Layer w16: C4.1 1434.06,435.45 1490.73,492.13 1489.58,493.28 v2(1480.99,493.28)
  Bottom Layer w16: v2(1480.99,493.28) 1489.58,493.28 1490.73,492.13 1489.75,492.13 1567.5,569.88 1730.45,569.88 1804.13,496.2 1804.13,439.55 1860.81,382.87 1941.93,382.87 1963.2,404.15 R32.2
NetC11_1: C11.1 R36.2 | length 47.1
  Bottom Layer w30: 2371.06,1273.11 R36.2@2371.06,1320.24
NetD2_2: D2.2 D3.1 | length 90.6
  Bottom Layer w30: D2.2 D3.1
NetF1_1: F1.1 FB1.2 | length 74.6
  Bottom Layer w25: FB1.2 F1.1@3675.83,705.55
NetFB1_1: FB1.1 J1.1 | length 352.3
  Bottom Layer w25: J1.1 3484.25,512.8 3501.97,530.51 3501.97,597.44 3535.43,630.91 FB1.1
NetIC3_3: IC3.3 IC3.4 Q21.1 | length 235.6
  Bottom Layer w16: IC3.3 1950.79,1213.58 1975.39,1188.98 Q21.1@1996.06,1188.98
NetN1_1: N1.1 R1.1 | length 255.3
  Bottom Layer w14: N1.1@2362.2,590.55 2362.2,640.76 2408.45,687.01 2524.96,687.01 R1.1
NetN1_2: N1.2 Q9.3 | length 173.2
  Bottom Layer w14: N1.2@2519.69,590.55 2588.58,590.55 2652.56,654.53 Q9.3@2652.56,668.31
NetN2_1: N2.1 R2.1 | length 236.9
  Bottom Layer w14: N2.1@2362.2,984.25 2362.2,947.83 2413.74,896.3 R2.1
NetN2_2: N2.2 Q10.3 | length 272.6
  Top Layer w14: N2.2@2519.69,984.25 2529.77,974.16 2529.77,938.32 2568.49,899.61 v2(2652.15,899.61)
  Bottom Layer w14: Q10.3 v2@2651.57,899.03
NetN3_1: N3.1 R8.1 | length 846.1
  Bottom Layer w14: N3.1@900.18,477.36 854.9,522.64 854.9,947.42 990.16,1082.68 1053.15,1082.68 1082.05,1111.57 1082.05,1165.35 R8.1@1076.14,1171.26
NetN4_1: N4.1 R10.1 | length 892.1
  Bottom Layer w14: R10.1@1386.81,1157.13 1393.7,1150.24 1393.7,1110.24 1420.62,1083.31 1488.54,1083.31 1615.73,956.12 1615.73,749.02 N4.1@1862.78,501.97
NetN5_1: N5.1 R12.1 | length 815.3
  Bottom Layer w14: N5.1@3275.59,503.94 3275.59,968.5 3384.65,1077.56 3473.23,1077.56 3505.28,1109.61 R12.1
NetN6_1: N6.1 R14.1 | length 1014.3
  Bottom Layer w14: R14.1 3804.76,1114.53 3841.73,1077.56 3892.5,1077.56 4031.09,938.98 4181.68,938.98 4243.68,876.97 4243.68,514.76
  Bottom Layer w16: 4243.68,514.76 N6.1@4284.04,474.41
NetQ1_1: Q1.1 R3.2 R7.1 | length 207.7
  Bottom Layer w12: R7.1@911.42,1329.37 R7.1@919.65,1329.37 ; R7.1@915.35,1325.43 994.37,1246.42 R3.2 ; R3.2@994.72,1250.98 Q1.1@1076.77,1250.98
NetQ1_3: Q1.3 R8.2 | length 114.2
  Bottom Layer w14: R8.2@1155.51,1171.26 Q1.3@1155.51,1285.43
NetQ2_1: Q2.1 R4.2 R9.1 | length 157.1
  Bottom Layer w12: Q2.1@1407.83,1326.42 R9.1@1564.96,1326.42
NetQ2_3: Q2.3 R10.2 | length 117.8
  Bottom Layer w12: R10.2@1317.91,1172.6 Q2.3@1317.91,1290.35
NetQ3_1: Q3.1 R5.2 R11.1 | length 186.9
  Bottom Layer w12: R11.1 3347.17,1342.17 R5.2 ; R5.2@3436.65,1263.78 Q3.1
NetQ3_3: Q3.3 R12.2 | length 128.1
  Bottom Layer w14: R12.2@3584.48,1173.04 Q3.3
NetQ4_1: Q4.1 R6.2 R13.1 | length 158.6
  Bottom Layer w12: Q4.1 3957.32,1338.58 R13.1@3957.68,1338.23
NetQ4_3: Q4.3 R14.2 | length 124.6
  Bottom Layer w12: R14.2@3720.47,1176.54 Q4.3
NetQ5_1: Q5.1 R17.1 | length 72.4
  Bottom Layer w14: Q5.1 R17.1@769.69,1402.09
NetQ5_3: Q5.3 R7.2 | length 104.3
  Bottom Layer w14: Q5.3 R7.2@911.42,1250.98
NetQ6_1: Q6.1 R18.1 | length 99.3
  Bottom Layer w12: Q6.1 1639.76,1328.27 R18.1@1701.26,1389.76
NetQ6_3: Q6.3 R9.2 | length 75.4
  Bottom Layer w16: R9.2@1593.86,1237.2 Q6.3@1669.29,1237.2
NetQ7_1: Q7.1 R19.1 | length 90.1
  Bottom Layer w12: Q7.1 3201.26,1331.69 R19.1@3263.27,1393.7
NetQ7_3: Q7.3 R11.2 | length 97.1
  Bottom Layer w12: Q7.3 R11.2@3333.31,1252.95
NetQ8_1: Q8.1 R20.1 | length 100.2
  Bottom Layer w12: Q8.1 4042.32,1331.22 R20.1@4110.71,1399.61
NetQ8_3: Q8.3 R13.2 | length 104
  Bottom Layer w12: R13.2 Q8.3@4072.48,1256.26
NetQ9_1: Q9.1 R15.1 | length 58.1
  Bottom Layer w10: Q9.1@2731.3,705.71 R15.1@2789.37,705.71
NetQ10_1: Q10.1 R16.1 | length 59.1
  Bottom Layer w10: Q10.1 R16.1@2789.37,852.36
NetQ11_1: Q11.1 R22.1 | length 61.5
  Bottom Layer w10: R22.1 Q11.1@327.76,885.83
NetQ12_1: Q12.1 R23.1 | length 64
  Bottom Layer w10: R23.1@280.51,984.25 309.06,1012.8 Q12.1
NetQ13_1: Q13.1 R24.1 | length 154.8
  Bottom Layer w10: Q13.1 4589.57,1092.52 4623.54,1058.54 R24.1
NetQ14_1: Q14.1 R25.1 | length 99.4
  Bottom Layer w10: Q14.1 4623.54,891.22 R25.1
NetQ15_1: Q15.1 R26.1 | length 96.1
  Bottom Layer w10: Q15.1 4610.24,824.8 4623.54,811.5 R26.1
NetQ16_1: Q16.1 R27.1 | length 64.5
  Bottom Layer w10: Q16.1@4559.05,688.98 R27.1
NetQ17_1: Q17.1 R28.1 | length 80.1
  Bottom Layer w10: Q17.1 4577.76,560.04 4608.27,590.55 R28.1
NetQ18_1: Q18.1 R29.1 | length 137.3
  Bottom Layer w10: R29.1 292.32,564.45 292.32,548.23 309.06,531.5 326.77,531.5 332.68,525.59 Q18.1
NetQ19_1: Q19.1 R30.1 | length 118.3
  Bottom Layer w10: R30.1 266.22,649.13 295.28,620.08 Q19.1
NetQ20_1: Q20.1 R31.1 | length 91.8
  Bottom Layer w10: R31.1 312.01,787.4 332.68,766.73 Q20.1
NetR34_1: R34.1 R35.2 | length 65.7
  Bottom Layer w16: R35.2@2734.88,1398.71 R34.1@2800.55,1398.71
NRST: IC1.7 TP5.1 | length 73.7
  Bottom Layer w10: IC1.7 2688.13,452.76 2718.16,452.76 2729.94,440.97 v1(2725.53,440.97)
PWM: IC1.42 IC3.1 R38.1 | length 1555.5
  Bottom Layer w10: IC3.1@1871.57,1398.11 1794.76,1398.11 1776.57,1379.92 1776.57,1312.99 1802.17,1287.4 1802.17,893.7 1846.44,849.43 1846.44,750.98 1892.7,704.72 2138.37,704.72 2219.08,624.02 2304.13,624.02 2310.04,618.11 2310.04,526.56 2354.31,482.28 2412.26,482.28 IC1.42
RXD1: IC1.31 TP2.1 | length 260.8
  Bottom Layer w10: TP2.1@2253.92,163.39 2253.92,199.21 2273.68,218.98 2297.81,218.98 2297.87,219.03 2426.57,219.03 IC1.31
TXD1: IC1.30 TP1.1 | length 150
  Bottom Layer w10: TP1.1 2398.76,163.39 IC1.30
UP: IC1.43 S2.1 | length 142.1
  Top Layer w10: S2.1 2440.94,443.94 2464.12,420.77 v1@2500.48,420.77
  Bottom Layer w10: IC1.43 v1@2491.28,431.1
  other v1: 2496.05,425.2
VSW: C11.2 D2.1 L1.2 Q21.2 | length 179.6
  Bottom Layer w30: Q21.2@2278.54,1279.53 Q21.2@2305.12,1252.95 ; C11.2 2403.15,1161.77 D2.1
  Bottom Layer w60: Q21.2@2066.93,1279.53 2102.36,1279.53
pads on no net: IC1.1 IC1.5 IC1.10 IC1.19 IC1.21 IC1.22 IC1.25 IC1.26 IC1.27 IC1.28 IC1.29 IC1.46 N3.0 N3.12 N4.0 N4.12 N5.0 N5.12 N6.0 N6.12

## Polygon pours and split planes (outlines as drawn)
GND on Top Layer "Bottom" (solid, remove dead copper, pour order 5): 57.66,336.04 122.12,400.51 ccw(c36.77,485.87) 157.48,485.87 157.48,1088.93 ccw(c36.77,1088.93) 122.12,1174.29 57.66,1238.76 cw(c196.85,1377.95) 336.04,1517.15 361.14,1492.05 ccw(c446.5,1577.4) 446.5,1456.69 4435.39,1456.69 ccw(c4435.39,1577.4) 4520.75,1492.05 4545.85,1517.15 cw(c4685.04,1377.95) 4824.23,1238.76 4799.13,1213.66 ccw(c4884.49,1128.3) 4763.78,1128.3 4763.78,446.5 ccw(c4884.49,446.5) 4799.13,361.14 4824.23,336.04 cw(c4685.04,196.85) 4545.85,57.66 4520.75,82.75 ccw(c4435.39,-2.6) 4435.39,118.11 446.5,118.11 ccw(c446.5,-2.6) 361.14,82.75 336.04,57.66 cw(c196.85,196.85)
GND on Bottom Layer "Bottom" (solid, remove dead copper, pour order 7): 57.66,336.04 122.12,400.51 ccw(c36.77,485.87) 157.48,485.87 157.48,1088.93 ccw(c36.77,1088.93) 122.12,1174.29 57.66,1238.76 cw(c196.85,1377.95) 336.04,1517.15 361.14,1492.05 ccw(c446.5,1577.4) 446.5,1456.69 4435.39,1456.69 ccw(c4435.39,1577.4) 4520.75,1492.05 4545.85,1517.15 cw(c4685.04,1377.95) 4824.23,1238.76 4799.13,1213.66 ccw(c4884.49,1128.3) 4763.78,1128.3 4763.78,446.5 ccw(c4884.49,446.5) 4799.13,361.14 4824.23,336.04 cw(c4685.04,196.85) 4545.85,57.66 4520.75,82.75 ccw(c4435.39,-2.6) 4435.39,118.11 446.5,118.11 ccw(c446.5,-2.6) 361.14,82.75 336.04,57.66 cw(c196.85,196.85)
VSW on Bottom Layer "Bottom" (solid, remove dead copper, pour order 4): 2392.71,1209.65 2320.87,1209.65 2320.87,1348.43 2091.54,1348.43 2091.54,1047.24 2253.94,1047.24 2385.83,1179.13 2392.72,1179.13

## Keep-outs
Keep-Out Layer:
  lines w5: 57.66,336.04 ccw(c196.85,196.85) 336.04,57.66 361.14,82.75 cw(c446.5,-2.6) 446.5,118.11 511.81,118.11 4370.08,118.11 4435.39,118.11 cw(c4435.39,-2.6) 4520.75,82.75 4545.85,57.66 ccw(c4685.04,196.85) 4824.23,336.04 4799.13,361.14 cw(c4884.49,446.5) 4763.78,446.5 4763.78,485.87 4763.78,682.72 4763.78,787.4 4763.78,892.08 4763.78,1088.93 4763.78,1128.3 cw(c4884.49,1128.3) 4799.13,1213.66 4824.23,1238.76 ccw(c4685.04,1377.95) 4545.85,1517.15 4520.75,1492.05 cw(c4435.39,1577.4) 4435.39,1456.69 4370.08,1456.69 511.81,1456.69 446.5,1456.69 cw(c446.5,1577.4) 361.14,1492.05 336.04,1517.15 ccw(c196.85,1377.95) 57.66,1238.76 122.12,1174.29 cw(c36.77,1088.93) 157.48,1088.93 157.48,892.08 157.48,787.4 157.48,682.72 157.48,485.87 cw(c36.77,485.87) 122.12,400.51 57.66,336.04

## Other copper
Bottom Layer:
  pour cut-out: 2564.96,543.94 2364.52,343.5 2564.96,143.06 2765.4,343.5

## Silkscreen, mask and mechanical layers (free items; w line width, h text height)
Top Overlay:
  text "CALIB" at 2670.28,504.92 h50 r90
  text "NRST" at 2670.28,375.98 h50 r90
Bottom Overlay:
  drawing of 1710 lines, arcs and shapes, not listed
  text "IN-12 Nixie Clock" at 3792.32,879.02 h55
  text "mightydevices.com" at 3813.98,833.66 h55
  text "BOOT" at 2389.76,480.32 h50 r45
  text "RXD" at 2276.57,214.57 h50
  text "GND" at 2800.2,214.57 h50
  text "TXD" at 2381.89,213.58 h50
Mechanical 1:
  lines w5: -4.92,0 4.92,0 ; 0,-4.33 0,4.33
  text "PCB Thickness:" at 2256.89,-22.64 h43.31
  text "1.5mm" at 2491.14,-22.64 h43.31
  text "Holes:" at 2382.87,-54.13 h43.31
  text ".hole_Count" at 2491.14,-54.13 h43.31

## Dimensions
4881.89,1377.95 to 0,1377.95 on Mechanical 1
78.74,1574.8 to 37.27,0 on Mechanical 1